# Altium PCB LT3790.PcbDoc
Units mil, origin at the board's own origin, x right, y up, seen from the top; angles counter-clockwise.
Board outline 3149.61 x 3149.61 mil, 2 copper layers (Top Layer, Bottom Layer); 38 components, 27 nets, 121 pads, 51 vias.
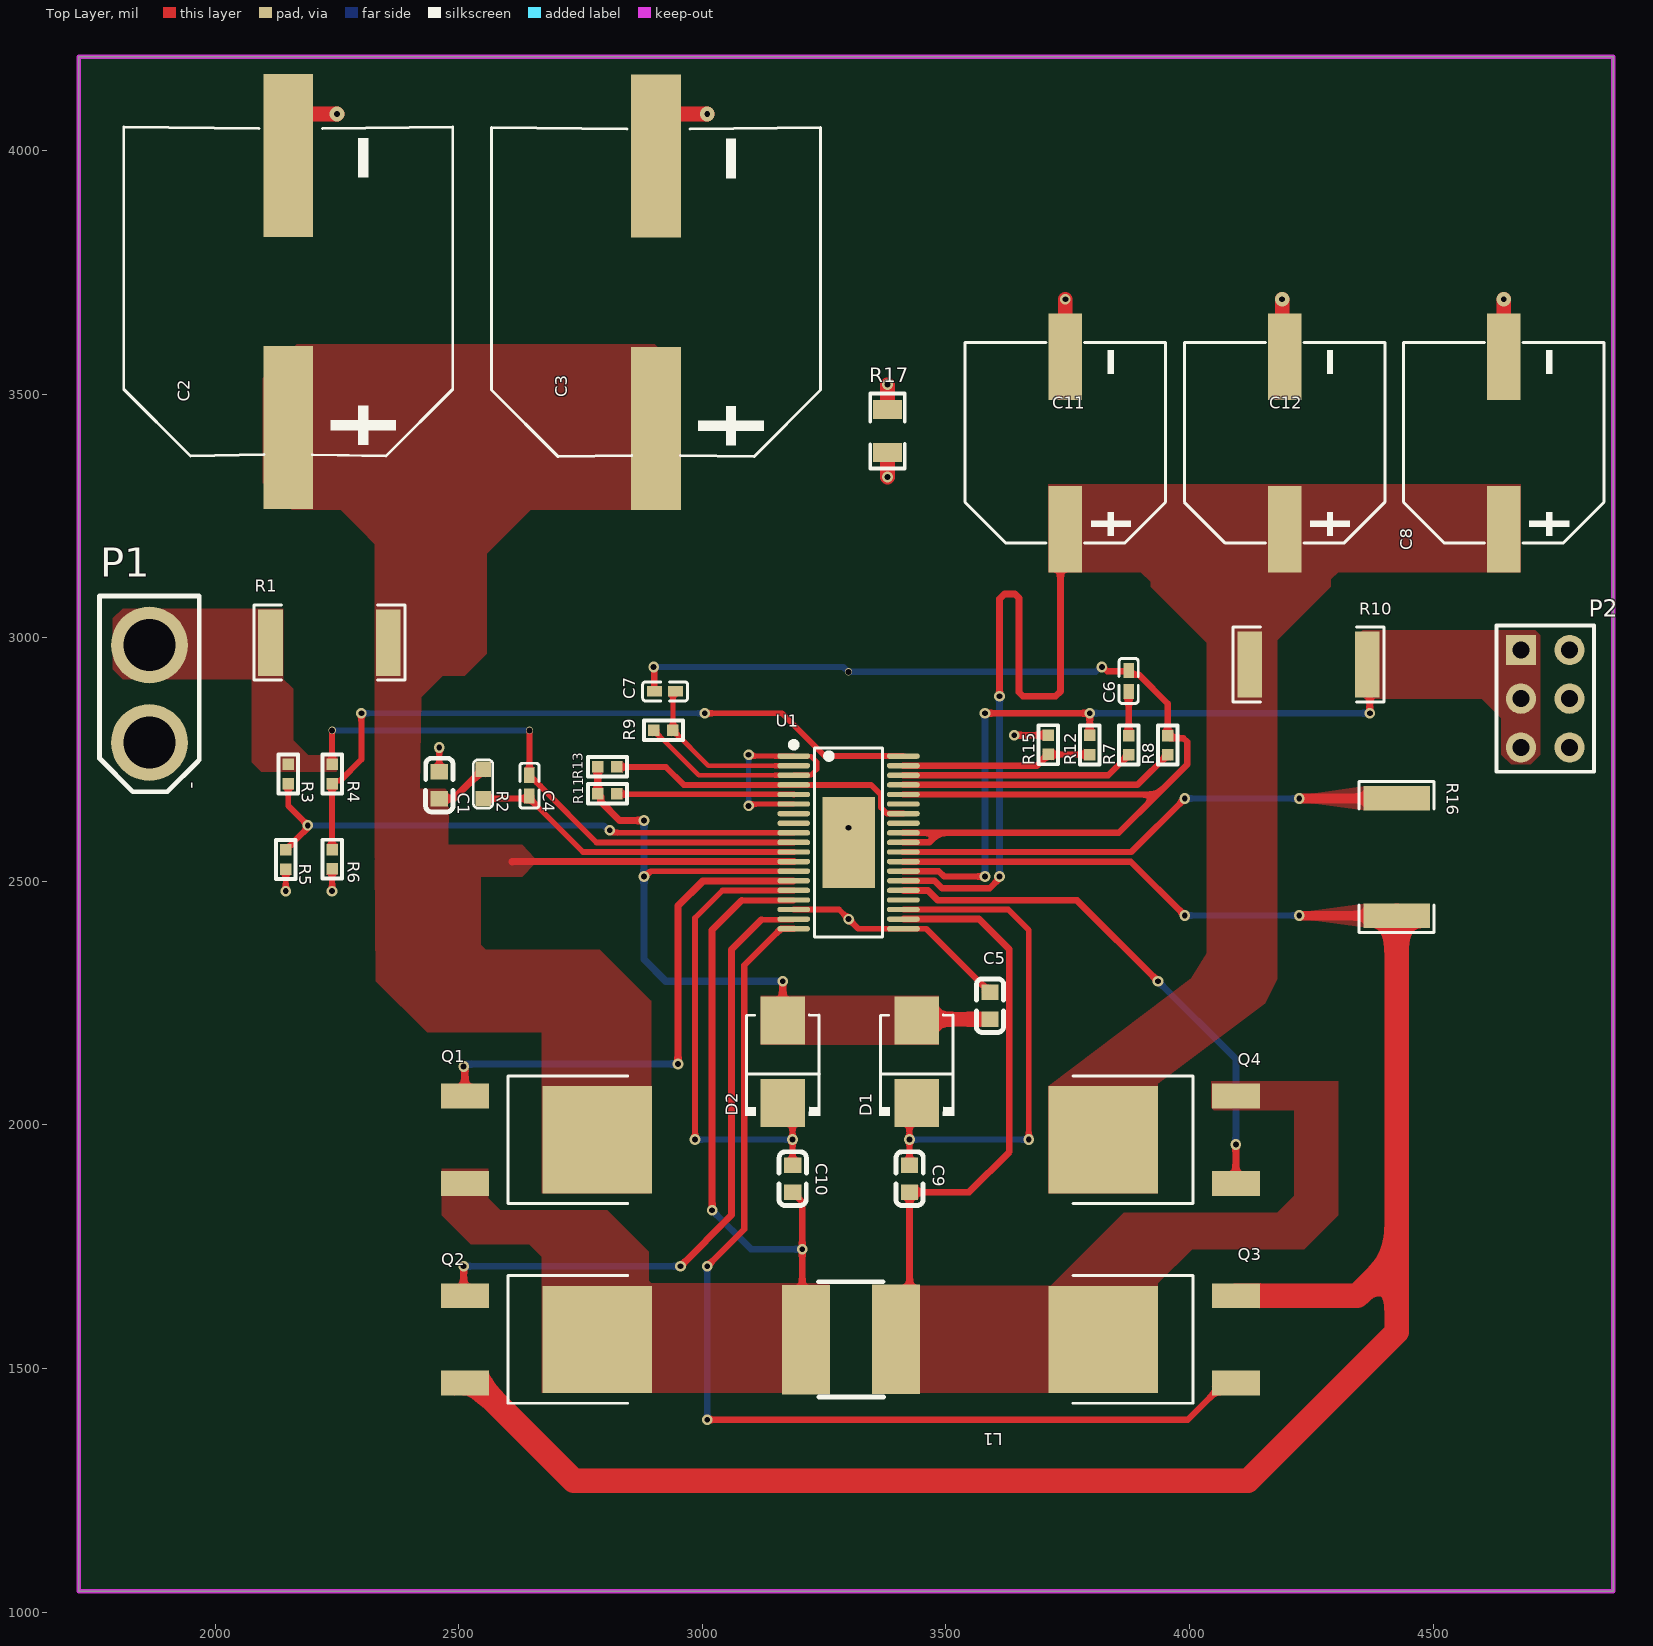
[diagram p0: Top Layer view]
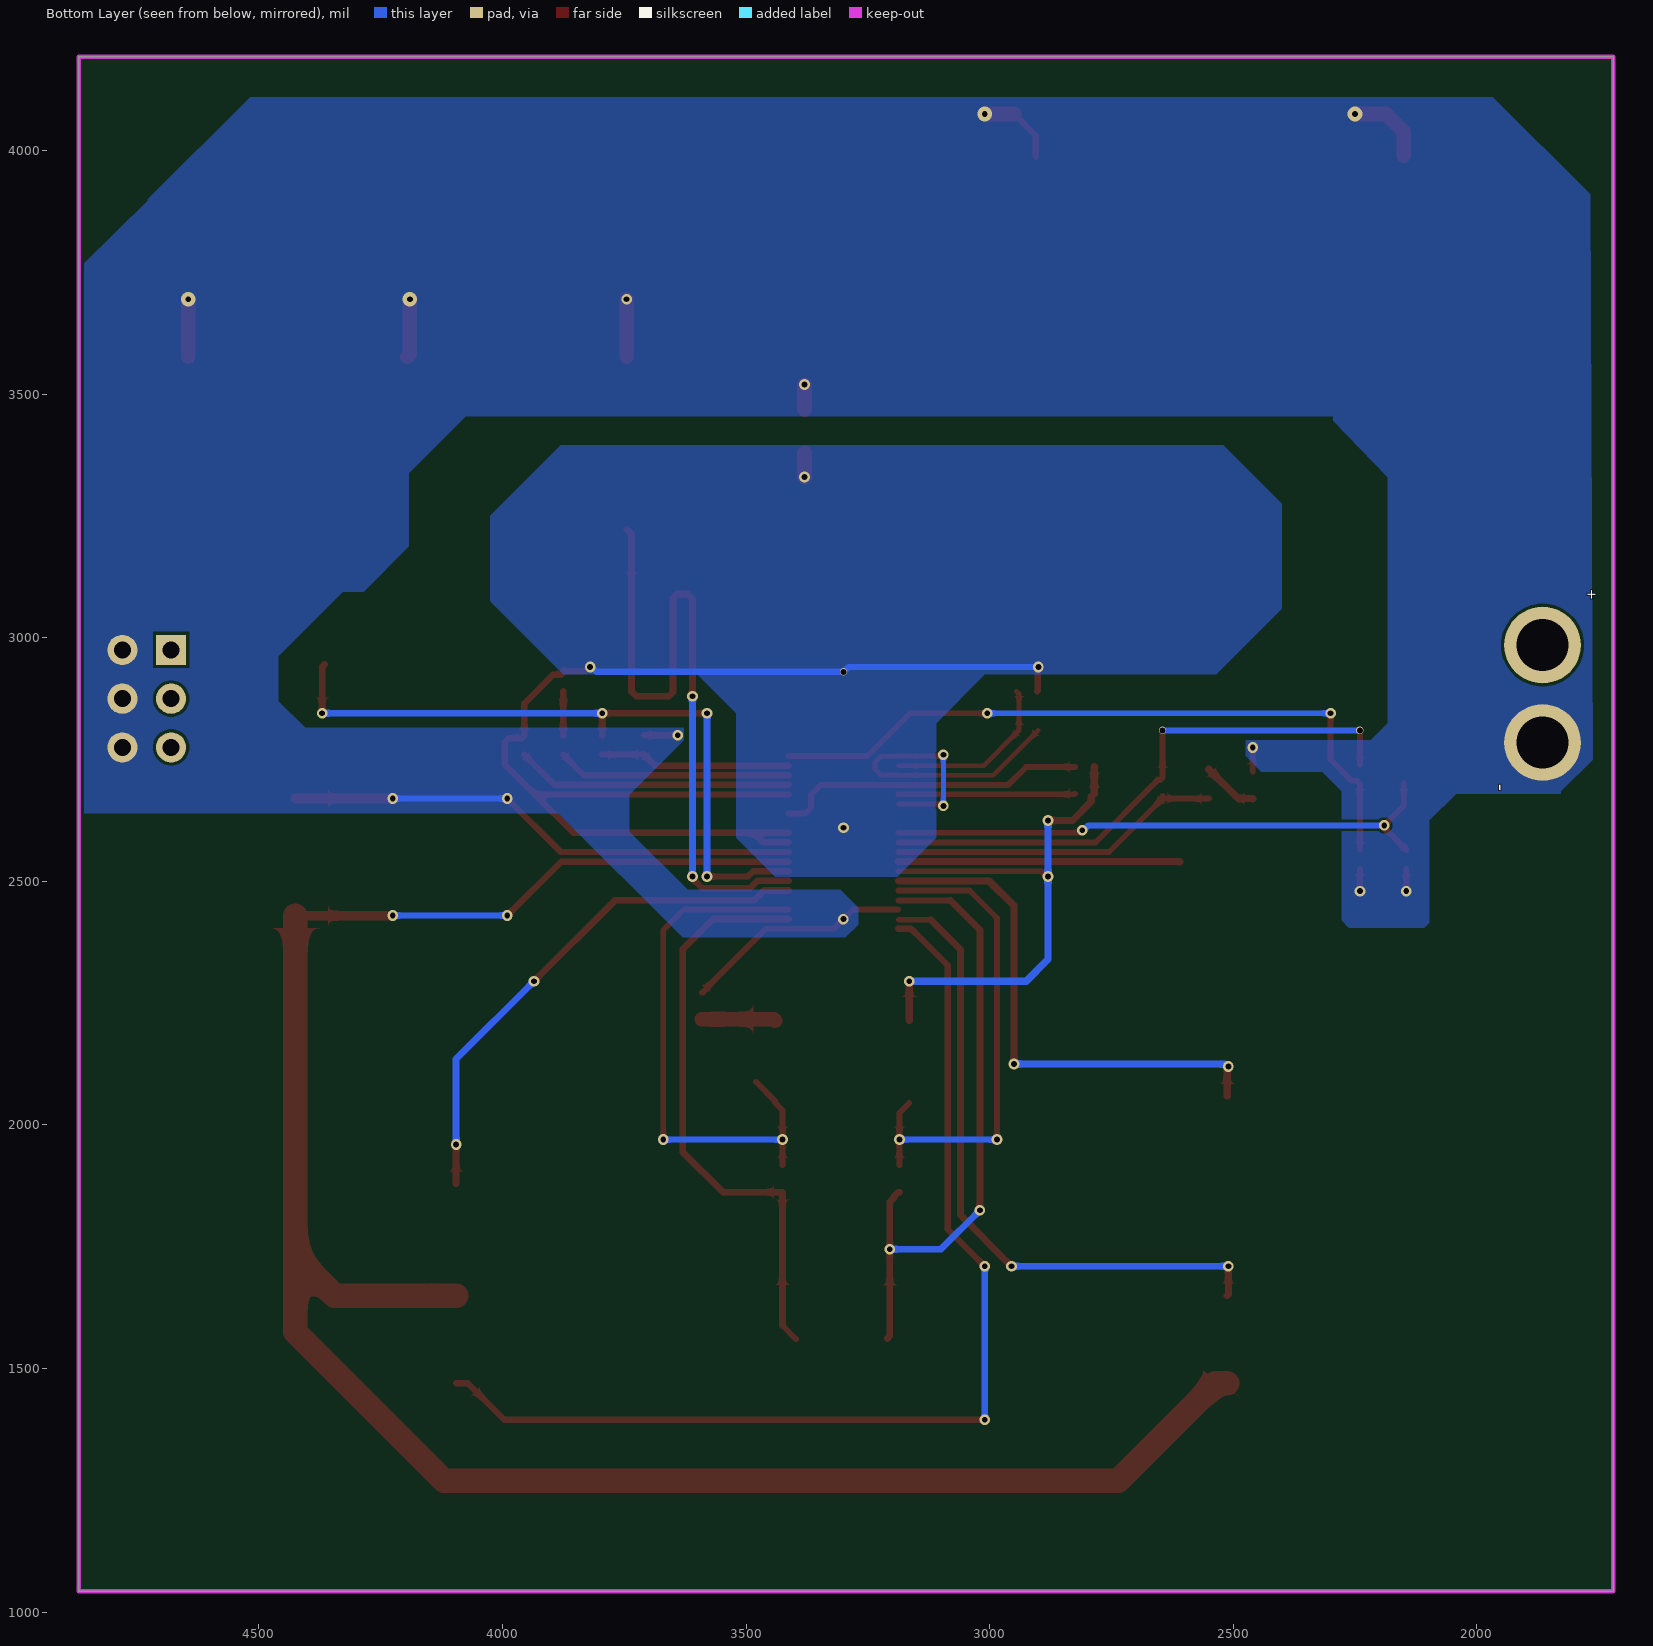
[diagram p1: Bottom Layer view, seen from below]

## Layer stack, top to bottom
Top Solder: solder mask 0.4, Solder Resist, Dk 3.5
Top Layer: signal copper 1.4
Dielectric 1: dielectric 12.6, FR-4, Dk 4.8
Bottom Layer: signal copper 1.4
Bottom Solder: solder mask 0.4, Solder Resist, Dk 3.5

## Board outline
1720,1042.99 1720,4192.6 4869.61,4192.6 4869.61,1042.99

## Design rules (kind name [scope] priority, off if disabled: settings)
Clearance Clearance_1 [All] p1: gap=6 ignorepadtopadclearanceinfootprint=FALSE except(0: Arc-Hole Track-Hole SMDPad-Hole THPad-Hole Via-Hole Fill-Hole Poly-Hole Region-Hole Text-Hole)
Clearance [All] p2: gap=10 ignorepadtopadclearanceinfootprint=FALSE except(0: Arc-Hole Track-Hole SMDPad-Hole THPad-Hole Via-Hole Fill-Hole Poly-Hole Region-Hole Text-Hole)
HoleToHoleClearance [All] p1: gap=0 allowstackedmicrovias=TRUE
MinimumSolderMaskSliver [All] p1: minsoldermaskwidth=0
PlaneClearance 1 [All] p1: clearance=20
PlaneConnect [All] p1: planeconnectstyle=Direct reliefexpansion=20 reliefentries=4 reliefconductorwidth=10 reliefairgap=10
PolygonConnect [All] p1: connectstyle=Direct reliefconductorwidth=10 reliefentries=4 polygonreliefangle="90 Angle" airgapwidth=10
RoutingCorners RoutingCorners_1 [All] p1: cornerstyle=45-Degree minsetback=100 maxsetback=100
RoutingCorners [All] p2: cornerstyle=45-Degree minsetback=100 maxsetback=100
RoutingVias [All] p1: holewidth=16 width=20 viastyle="Through Hole" minholewidth=5 minwidth=15 maxholewidth=30 maxwidth=50
SilkToSilkClearance [All] p1: silktosilkclearance=0
SilkToSolderMaskClearance [IsPad] p1: minsilkscreentomaskgap=0 clearancetoexposedcopper=TRUE
SolderMaskExpansion [All] p1: expansion=4 istentingtop=FALSE
Width [All] p1: maxlimit=200 minlimit=5 preferedwidth=10 minimp=50.000000 maximp=50.000000 favimp=50.000000
23 further rules are at their usual default settings.

## Components (designator, comment, footprint, x,y, rotation, side; value= is the part's Value field where it differs from the comment)
C1 "1uF" CAP0603 2459.71,2697.78 r270 top
C2 "63V" "CAP-SMD_D16xl 16.5mm" 2150.02,3710.74 r90 top value=470uF
C3 "63V" "CAP-SMD_D16xl 16.5mm" 2905.02,3709.26 r90 top value=330uF
C4 "470nF" cap0402 2645,2696.46 r90 top
C5 "4.7uF" CAP0603 3590,2245 r270 top
C6 "33nF" cap0402 3875,2911.46 r270 top
C7 "33nF" cap0402 2923.54,2890 r180 top
C8 "35V" SMD,D10xl10.5mm 4645,3400 r90 top value=470uF
C9 "0.1uF" CAP0603 3425,1890 r270 top
C10 "0.1uF" CAP0603 3185,1890 r270 top
C11 "50V" CAP-SMD,D10xl10.5mm 3745,3400 r90 top value=330uF
C12 "50V" CAP-SMD,D10xl10.5mm 4195,3400 r90 top value=330uF
D1 "Diode 10TQ035" LED-SMB 3440.37,2129.64 r90 top
D2 "Diode 10TQ035" LED-SMB 3165.37,2129.64 r90 top
L1 "Inductor" IND-SMD_L6.0-W6.0 3305,1560 r0 top value=68uH
P1 "Header 2" XT30-M 1865,2885 r270 top
P2 "Header 6" HDR-M-2.54_2X3 4738.89,2881.18 r270 top
Q1 "" "N-mos TO-252"#1 2680,1969.76 r180 top
Q2 "" "N-mos TO-252"#1 2680,1559.76 r180 top
Q3 "" "N-mos TO-252"#1 3927.48,1559.76 r0 top
Q4 "" "N-mos TO-252"#2 3927.48,1969.76 r0 top
R1 "0.003Ω" RES2512#1 2234.28,2990 r180 top
R2 "51Ω" RES0603 2550,2700 r270 top
R3 "499K" res0402 2150,2720.32 r270 top
R4 "499K" res0402 2240,2720.32 r270 top
R5 "56.2K" res0402 2145,2545 r270 top
R6 "27.4K" res0402 2240,2545.63 r270 top
R7 "3.3K" res0402 3875,2779.69 r270 top
R8 "147K" res0402 3955,2779.69 r270 top
R9 "100K" res0402 2920,2810 r0 top
R10 "0.009Ω" RES2512#2 4244.28,2945 r180 top
R11 "200K" res0402 2805,2680 r180 top
R12 "51K" res0402 3795,2780 r90 top
R13 "100K" res0402 2805,2735 r180 top
R15 "2.2K" res0402 3710,2780.32 r270 top
R16 "0.004Ω" RES2512#2 4425,2550 r270 top
R17 "0" RES0805 3380,3424.26 r270 top
U1 "" LT3790 3300,2580 r270 top

## Footprints (in the part's own frame and the unit in brackets; to place one, negate y for a bottom-side part, rotate by r counter-clockwise, add the part's x,y. Pads: shape width x height; smd on the part's side, far side on the other; paste and mask are expansions set on the pad)
cap0402 [mm]
  rect 0.79x0.54 smd: 1(-0.545,0) 2(0.545,0)
  silkscreen extent -1.17,-0.5 1.17,0.5
CAP0603 [mm]
  rect 0.8x0.9 smd: 1(-0.691,0.007) 2(0.708,0.007)
  silkscreen extent -1.4,-0.7 1.4,0.72
CAP-SMD,D10xl10.5mm [mm]
  rect 4.5x1.75 smd: 1(-4.5,0) 2(4.5,0)
  silkscreen extent -5.23,-5.23 5.23,5.23
"CAP-SMD_D16xl 16.5mm" [mm]
  rect 8.5x2.6 smd: 1(-7.093,0.001) 2(7.093,0.001)
  silkscreen extent -8.57,-8.58 8.58,8.58
HDR-M-2.54_2X3 [mil]
  rect 62x62 hole 35: 1(-93.82,-58.89)
  round 62 hole 35: 2(-93.82,41.11) 3(6.18,-58.89) 4(6.18,41.11) 5(106.18,-58.89) 6(106.18,41.11)
  silkscreen extent -144,-109 156,91
IND-SMD_L6.0-W6.0 [mm]
  rect 2.5x5.7 smd: 1(-2.35,-0.013) 2(2.35,0.013)
  silkscreen extent -1.69,-3 1.69,3
LED-SMB [mm]
  rect 2.5x2.3 smd: 1(-2.15,0.009) 2(2.15,0.009)
  silkscreen extent -2.81,-1.95 2.43,1.96
LT3790 [mm]
  oval 0.28x1.715 smd: 1(-4.5,-2.858) 2(-4,-2.858) 3(-3.5,-2.858) 4(-3,-2.858) 5(-2.5,-2.858) 6(-2,-2.858) 7(-1.5,-2.858) 8(-1,-2.858) 9(-0.5,-2.857) 10(0,-2.857) 11(0.5,-2.857) 12(1,-2.857) 13(1.5,-2.857) 14(2,-2.857) 15(2.5,-2.857) 16(3,-2.857) 17(3.5,-2.857) 18(4,-2.857) 19(4.5,-2.857) 20(4.5,2.858) 21(4,2.858) 22(3.5,2.858) 23(3,2.858) 24(2.5,2.858) 25(2,2.858) 26(1.5,2.858) 27(1,2.858) 28(0.5,2.857) 29(0,2.857) 30(-0.5,2.857) 31(-1,2.857) 32(-1.5,2.857) 33(-2,2.857) 34(-2.5,2.857) 35(-3,2.857) 36(-3.5,2.857) 37(-4,2.857) 38(-4.5,2.857)
  rect 4.75x2.74 smd: 39(0,0)
  silkscreen extent -5.24,-3.01 4.93,1.77
"N-mos TO-252"#1 [mm]
  rect 2.5x1.3 smd: 1(4.255,-2.28) 3(4.255,2.28)
  rect 5.7x5.6 smd: 2(-2.655,0)
  silkscreen extent -4.24,-3.33 2.01,3.33
"N-mos TO-252"#2 [mm]
  rect 5.7x5.6 smd: 2(-2.655,0)
  rect 2.5x1.3 smd: 3(4.255,2.28) t(4.255,-2.28)
  silkscreen extent -4.24,-3.33 2.01,3.33
res0402 [mm]
  rect 0.6x0.6 smd: 1(-0.5,0) 2(0.5,0)
  silkscreen extent -1.02,-0.51 1.02,0.51
RES0603 [mil]
  rect 32x32 smd: 1(-30,0) 2(30,0)
  silkscreen extent -50,-20 50,20
RES0805 [mm]
  rect 1x1.5 smd: 1(-1.124,0) 2(1.124,0)
  silkscreen extent -1.96,-0.9 1.96,0.9
RES2512#1 [mil]
  rect 50.49x136.06 smd: 2(-120.72,0) ""(120.72,0)
  silkscreen extent -155,-77 155,77
RES2512#2 [mil]
  rect 50.49x136.06 smd: 1(120.72,0) 2(-120.72,0)
  silkscreen extent -155,-77 155,77
SMD,D10xl10.5mm [mm]
  rect 4.5x1.75 smd: 1(-4.5,0) 2(4.5,0)
  silkscreen extent -5.23,-5.23 5.23,5.23
XT30-M [mm]
  round 4 hole 2.7: 1(-2.54,0) 2(2.54,0)
  silkscreen extent -5.1,-2.6 5.11,2.6, body extent -5.1,-2.8 5.1,2.8, height 10.66

## Part data
C1 C5 C9 C10 C12: library part Cap, "0603", LatestRevisionDate=17-Jul-2002, LatestRevisionNote="Re-released for DXP Platform.", PackageDescription="Radial Cap, Thru-Hole; 2 Leads; 0.3 in Pin Spacing", PackageReference=RAD-0.3, Published=8-Jun-2000, Publisher="Altium Limited"
C2: library part Cap, "SMD D16xl", LatestRevisionDate=17-Jul-2002, LatestRevisionNote="Re-released for DXP Platform.", PackageDescription="Radial Cap, Thru-Hole; 2 Leads; 0.3 in Pin Spacing", PackageReference=RAD-0.3, Published=8-Jun-2000, Publisher="Altium Limited"
C3: library part Cap2, "SMD,D16xl", PackageDescription="Capacitor; 2 Leads", PackageReference=CAPR5-4X5, Published=23-Sep-2002, Publisher="Altium Limited"
C4 C6 C7: library part Cap, "0402", LatestRevisionDate=17-Jul-2002, LatestRevisionNote="Re-released for DXP Platform.", PackageDescription="Radial Cap, Thru-Hole; 2 Leads; 0.3 in Pin Spacing", PackageReference=RAD-0.3, Published=8-Jun-2000, Publisher="Altium Limited"
C8: library part Cap2, "RVT470UF35V67RV0056", PackageDescription="Capacitor; 2 Leads", PackageReference=CAPR5-4X5, Published=23-Sep-2002, Publisher="Altium Limited"
C11: library part Cap, "VHTE1051V331MVTMCG", LatestRevisionDate=17-Jul-2002, LatestRevisionNote="Re-released for DXP Platform.", PackageDescription="Radial Cap, Thru-Hole; 2 Leads; 0.3 in Pin Spacing", PackageReference=RAD-0.3, Published=8-Jun-2000, Publisher="Altium Limited"
D1 D2: "SMBJ5340B", ComponentLink1Description="Manufacturer Link", ComponentLink1URL=http://www.irf.com/, ComponentLink2Description=Datasheet, ComponentLink2URL=http://www.irf.com/product-info/datasheets/data/10tq.pdf, DatasheetVersion=PD-2.057B, LatestRevisionDate=17-Jul-2002, LatestRevisionNote="Re-released for DXP Platform.", Note="Terminal 2 is the TAB and is electrically connected to the cathode", PackageDescription="TO, Thru-Hole, Vertical, Heatsink Mounted; 3 In-Line Leads (1 Absent); Pitch 2.54 mm", PackageReference=TO-220AC, PackageVersion=Feb-1998, Published=8-Jun-2000, Publisher="Altium Limited"
L1: "SWPA6045S680MT", Code_IEC=1005, Code_JEITA=0402, LatestRevisionDate=29-May-2009, LatestRevisionNote="IPC-7351 Footprint Added.", PackageDescription="Chip Inductor", PackageReference=0402-A, Published=8-Jun-2000, Publisher="Altium Limited"
P1: "Header, 2-Pin", LatestRevisionDate=17-Jul-2002, LatestRevisionNote="Re-released for DXP Platform.", Publisher="Altium Limited"
P2: "Header, 6-Pin", LatestRevisionDate=17-Jul-2002, LatestRevisionNote="Re-released for DXP Platform.", Publisher="Altium Limited"
Q1: library part MOSFET-N, "SM4132T9RL", LatestRevisionDate=17-Jul-2002, LatestRevisionNote="Re-released for DXP Platform.", PackageDescription="TO, Flat Index; 3 In-Line, Axial Leads; Body Dia. 4.6mm; Lead Dia. 0.5 mm (max)", PackageReference=E3, PackageVersion=1995/1996, Published=8-Jun-2000, Publisher="Altium Limited"
Q2 Q3 Q4: library part MOSFET-N, "N-Channel MOSFET", LatestRevisionDate=17-Jul-2002, LatestRevisionNote="Re-released for DXP Platform.", PackageDescription="TO, Flat Index; 3 In-Line, Axial Leads; Body Dia. 4.6mm; Lead Dia. 0.5 mm (max)", PackageReference=E3, PackageVersion=1995/1996, Published=8-Jun-2000, Publisher="Altium Limited"
R1 R10 R16: library part Res3, "2512", LatestRevisionDate=29-May-2009, LatestRevisionNote="IPC-7351 Footprint Added.", PackageDescription="Chip Resistor", PackageReference=J1-0603, Published=8-Jun-2000, Publisher="Altium Limited"
R2: library part Res3, "0603", LatestRevisionDate=29-May-2009, LatestRevisionNote="IPC-7351 Footprint Added.", PackageDescription="Chip Resistor", PackageReference=J1-0603, Published=8-Jun-2000, Publisher="Altium Limited"
R3 R4 R5 R6 R12 R15: library part Res3, "0402", LatestRevisionDate=29-May-2009, LatestRevisionNote="IPC-7351 Footprint Added.", PackageDescription="Chip Resistor", PackageReference=J1-0603, Published=8-Jun-2000, Publisher="Altium Limited"
R7 R8 R9 R11 R13: library part Res1, "0402", LatestRevisionDate=17-Jul-2002, LatestRevisionNote="Re-released for DXP Platform.", PackageDescription="Axial Device, Thru-Hole; 2 Leads; 0.3 in Pin Spacing", PackageReference=AXIAL-0.3, Published=8-Jun-2000, Publisher="Altium Limited"
R17: library part Res2, "0805", LatestRevisionDate=17-Jul-2002, LatestRevisionNote="Re-released for DXP Platform.", PackageDescription="Axial Device, Thru-Hole; 2 Leads; 0.4 in Pin Spacing", PackageReference=AXIAL-0.4, Published=8-Jun-2000, Publisher="Altium Limited"
U1: library part LT3790EFE#PBF

## Via types
v1: diameter 22, hole 12, Top Layer to Bottom Layer, 44 vias
v2: diameter 30, hole 12, Top Layer to Bottom Layer, 4 vias
v3: diameter 15, hole 12, Top Layer to Bottom Layer, 3 vias

## Nets (pads, with @x,y where several pads share a name; then routed paths per layer and width w, separated by ;. In a path a pad name is that pad's centre, name@x,y a point inside that pad or via, vN(x,y) a via of type N, cw(c..) or ccw(c..) an arc to the next point about the centre after c; other vN are vias at no path point)
BG1: Q2.1 U1.18 | length 1351.7
  Top Layer w12: 3121.35,2421.35 U1.18@3186.33,2421.35
  Top Layer w14: v1(2510,1710) 2510,1652 Q2.1 ; v1(2955,1710) 3060,1815 3060,2360 3121.35,2421.35
  Bottom Layer w14: v1(2510,1710) v1(2955,1710)
BG2: Q3.1 U1.19 | length 2212.8
  Top Layer w13: v1(3010,1395) 3996.38,1395 4071.38,1470 Q3.1 ; v1(3010,1710) 3085.98,1785.98 3085.98,2327.59 3161.23,2402.84 U1.19
  Bottom Layer w13: v1(3010,1395) v1(3010,1710)
BST1: C10.1 D2.1 U1.15 | length 1017.1
  Top Layer w12: v1(2985,1970) 2985,2425 3041.09,2481.09 3187.01,2481.09 U1.15 ; D2.1 3185,2025 v1(3185,1970) 3185.15,1969.85 3185.15,1917.37 C10.1
  Bottom Layer w12: v1(2985,1970) v1(3185,1970)
BST2: C9.1 D1.1 U1.22 | length 1143.6
  Top Layer w12: U1.22 3627.79,2442.21 3670,2400 v1(3670,1970) ; C9.1 3425.15,1917.37 3425.15,1969.85 v1(3425,1970) 3425,2030 D1.1 3440,2048.94 D1.1@3479.28,2088.21
  Bottom Layer w12: v1(3425,1970) v1(3670,1970)
C/10: R13.1 U1.4 U1.32 | length 642.9
  Top Layer w12: R13.1 2925,2735 2961.89,2698.11 U1.4 3346.3,2698.11 3366.74,2677.67 3366.74,2651.49 3378.68,2639.55 3412.01,2639.55 U1.32
EN/UVLO: R3.2 R5.1 U1.9 | length 1175
  Top Layer w12: R5.1 2188.09,2607.77 2188.09,2613.09 v1(2190,2615) 2150,2655 R3.2 ; v1(2810,2605) 2812.71,2605 2818.02,2599.69 U1.9
  Bottom Layer w12: v1(2190,2615) 2797.29,2615 2807.29,2605 v1(2810,2605)
FB: R12.1 R15.2 U1.37 | length 392.2
  Top Layer w13: U1.37 3686.86,2737.49 R15.2 3710.16,2760.47 3794.84,2760.47 R12.1
INTVCC: C5.2 D1.2 D2.2 R11.2 R13.2 U1.13 | length 1311.8
  Top Layer w12: R13.2@2785,2734.69 R13.2 ; R11.2 R11.2@2791.12,2674.19 ; v1(2880,2510) 2882.71,2510 2893.66,2520.95 U1.13
  Top Layer w15: R11.2 R13.2 ; R11.2@2791.12,2674.19 2791.12,2663.88 2830,2625 v1(2880,2625) ; D2.2 v1(3165,2295)
  Top Layer w30: D1.2 3442.82,2217.11 C5.2
  Bottom Layer w15: v1(2880,2625) v1(2880,2510) 2880,2340 2925,2295 v1(3165,2295)
ISN: P2.1 P2.3 P2.5 R10.2 R12.2 U1.26 | length 1444.4
  Top Layer w13: U1.26 3485.18,2520.95 3496.13,2510 v1(3580,2510)
  Top Layer w14: v1(3580,2845) v1(3795,2845) R12.2 ; R10.2 4370,2940 v1(4370,2845)
  Bottom Layer w14: v1(3580,2510) v1(3580,2845) ; v1(3795,2845) v1(4370,2845)
ISP: C8.1 C11.1 C12.1 Q4.2 R10.1 U1.25 | length 1456.7
  Top Layer w13: U1.25 3476.58,2501.26 3491.84,2486 3589.94,2486 v1@3608.47,2504.53
  Top Layer w14: v1@3608.47,2504.53 3608.47,2508.47 v1(3610,2510) ; v1(3610,2880) 3610,3080 3620,3090 3641.8,3090 3650,3081.8 3650,2888.2 3658.2,2880 3725,2880 3735,2890 3735,3212.84 C11.1
  Bottom Layer w14: v1(3610,2510) v1(3610,2880)
IVINN: C4.1 R2.2 U1.11 | length 689.8
  Top Layer w12: R2.2 2640.37,2670 C4.1@2645,2674.63 ; C4.1 C4.1@2645,2674.63 ; U1.11 2754.76,2560.32 2645,2670.08 C4.1@2645,2674.63
IVINP: C4.2 P1.1 R1. R3.1 R4.1 U1.10 | length 1169.7
  Top Layer w12: R4.1 v3(2240,2810) ; v3(2645,2810) 2645,2712.99 2649.63,2708.36 2654.55,2708.36 2660.36,2702.55 2660.6,2702.55 2667.63,2695.52 2667.63,2695.29 2782.91,2580.01 U1.10
  Bottom Layer w12: v3(2240,2810) v3(2645,2810)
NetC6_2: C6.2 R7.1 | length 90.6
  Top Layer w14: R7.1 C6.2
NetC7_1: C7.1 R9.2 U1.2 | length 360
  Top Layer w10: C7.1 2939.69,2884.69 R9.2 3012.2,2737.49 U1.2
NetR7_2: R7.2 U1.36 | length 480
  Top Layer w13: U1.36 3832.8,2717.8 R7.2
NetR8_2: R8.2 U1.35 | length 568.1
  Top Layer w13: U1.35 3893.11,2698.11 R8.2
NetR9_1: R9.1 U1.1 U1.3 U1.6 | length 738.2
  Top Layer w10: R9.1 2992.52,2717.8 U1.3 3187.7,2718 3223,2718 3235,2730 3235,2745 3223.03,2756.97 3187.7,2756.97 U1.1 3101.08,2757.17 3098.25,2760 v1(3095,2760) ; v1(3095,2655) 3098.25,2655 3101.99,2658.74 U1.6
  Bottom Layer w10: v1(3095,2655) v1(3095,2760)
Node1: C1.2 C2.1 C3.1 Q1.2 R1.2 R2.1 U1.12 | length 692.7
  Top Layer w15: C1.2 2460.11,2670 2490,2670 R2.1 ; 2610,2540 2610.64,2540.64 U1.12
OVLO: R4.2 R6.1 U1.38 | length 1459.7
  Top Layer w12: R6.1 R4.2 2245.81,2706.44 2256.44,2706.44 2300,2750 v1(2300,2845) ; v1(3005,2845) 3163.45,2845 3251.28,2757.17 U1.38
  Bottom Layer w12: v1(2300,2845) v1(3005,2845)
PGND: C1.1 C2.2 C3.2 C5.1 C8.2 C11.2 C12.2 P1.2 P2.2 P2.4 P2.6 R5.2 R6.2 R15.1 R16.2 R17.1 U1.17 U1.20 U1.28 | length 2479.8
  Top Layer w12: v1(2145,2480) R5.2 ; v1(2240,2480) R6.2 ; C1.1 v1(2460,2775) ; U1.17 3280.56,2442.21 3319.93,2402.84 U1.20 3459.67,2402.84 3578.58,2283.94 3578.58,2281.97 3588.33,2272.22 C5.1
  Top Layer w13: C3.2 2905,4030.32 C3.2@2949.68,4075 ; U1.28 3880.32,2560.32 v1(3990,2670)
  Top Layer w14: v1(3640,2800) R15.1
  Top Layer w20: v1(4225,2670) 4225.36,2670.36 4424.64,2670.36 R16.2
  Top Layer w30: C2.2 2150,4038.82 2186.18,4075 v2(2250,4075) ; C3.2@2949.68,4075 v2(3010,4075) ; v1(3379.8,3519.73) 3380,3519.53 R17.1 ; C11.2 v1(3745,3695) ; v2(4190,3695) 4190,3582.16 C12.2 ; C8.2 v2(4645,3695)
  Bottom Layer w13: v1(3990,2670) v1(4225,2670)
  other v1: 3300.24,2422.53
SGND: C6.1 C7.2 R8.1 R17.2 U1.29 U1.30 U1.34 U1.39 | length 2626.2
  Top Layer w13: v1(2900,2940) 2901.04,2938.96 2901.04,2891.04 C7.2 ; U1.29 3466.15,2580.01 3485.84,2599.69 3512.23,2599.69 ; U1.30 3512.23,2599.69 ; U1.34 3933.43,2678.43 ; v1(3820,2940) 3822.44,2940 3830.98,2931.46 3870.87,2931.46 3872.33,2932.92 C6.1 3875,2927.99 3879.13,2923.86 3896.14,2923.86 3955,2865 R8.1 3960.31,2794.06 3987.38,2794.06 3995,2786.44 3995,2740 3933.43,2678.43 ; 3512.23,2599.69 3854.69,2599.69 3933.43,2678.43
  Top Layer w30: v1(3380,3330) R17.2
  Bottom Layer w13: v1(2900,2940) 3289.46,2940 3299.46,2930 3807.56,2930 3817.56,2940 v1(3820,2940)
  other v1: 3300,2610
  other v3: 3300,2930
SHORT: R11.1 U1.5 | length 363.5
  Top Layer w12: R11.1 2825.76,2678.92 3187.01,2678.92 U1.5
SNSP: Q2.3 Q3.3 R16.1 U1.27 | length 4397.9
  Top Layer w13: U1.27 3879.36,2540.64 v1(3990,2430)
  Top Layer w20: v1(4225,2430) 4225.36,2429.64 4424.64,2429.64 R16.1
  Top Layer w50: Q2.3 2536.1,1470 2736.1,1270 4120,1270 4425,1575 4425,1730 ; Q3.3 4344.53,1649.53 4425,1730 ; R16.1 4425,1730
  Bottom Layer w13: v1(3990,2430) v1(4225,2430)
SW1: C10.2 L1.1 Q1.3 Q2.2 U1.16 | length 1296.1
  Top Layer w13: 3080.72,2460.72 U1.16@3186.33,2460.72
  Top Layer w14: v1(3020,1825) 3020,2400 3080.72,2460.72 ; C10.2 3187.26,1862.11 3196.01,1853.36 3196.01,1851.39 3205,1842.4 v1(3205,1745) 3205,1566.98 L1.1@3210,1561.98
  Bottom Layer w14: v1(3020,1825) 3100,1745 v1(3205,1745)
SW2: C9.2 L1.2 Q3.2 Q4.3 U1.21 | length 1210.6
  Top Layer w12: L1.2 L1.2@3425.29,1588.27
  Top Layer w14: U1.21 3567.47,2422.53 3630,2360 3630,1945 3547.11,1862.11 C9.2 L1.2@3425.29,1588.27
TG1: Q1.1 U1.14 | length 1086.4
  Top Layer w14: 3000.59,2500.59 U1.14@3186.83,2500.59
  Top Layer w15: v1(2510,2120) 2510,2118.11 2512.48,2115.63 Q1.1 ; v1(2950,2125) 2950,2450 3000.59,2500.59
  Bottom Layer w15: v1(2510,2120) 2511.89,2120 2516.89,2125 v1(2950,2125)
TG2: Q4.t U1.24 | length 1081.1
  Top Layer w14: U1.24 3463.42,2481.58 3483.79,2461.21 3768.79,2461.21 v1(3935,2295) ; Q4.t v1(4095,1960)
  Bottom Layer w14: v1(3935,2295) 4095,2135 v1(4095,1960)
pads on no net: U1.7 U1.8 U1.23 U1.31 U1.33

## Polygon pours and split planes (outlines as drawn)
ISN on Top Layer "ISN_L01_P015" (solid, remove dead copper, pour order 15): 4700,2740 4720,2760 4720,3005 4710,3015 4355,3015 4340,3000 4340,2895 4360,2875 4600,2875 4640,2835 4640,2760 4660,2740
SNSP on Top Layer "SNSP_L01_P013" (solid, remove dead copper, pour order 13): 4250,2440 4250,2420 4360,2405 4360,2455
PGND on Top Layer "PGND_L01_P012" (solid, remove dead copper, pour order 12): 4250,2680 4250,2660 4360,2645 4360,2695.95
SW2 on Top Layer "SW2_L01_P011" (solid, remove dead copper, pour order 11): 4005,1745 4235,1745 4305,1815 4305,2090 4045,2090 4045,2035 4050,2030 4215,2030 4215,1855 4180,1820 3865,1820 3715,1670 3710,1670 3710,1630 3935,1630 3935,1675
ISP on Top Layer "ISP_L01_P010" (solid, remove dead copper, pour order 10): 4305,3135 4290,3120 4290,3105 4175,2990 4035,2990 3920,3105 3920,3115 3900,3135 3710,3135 3710,3315 4680,3315 4680,3135
ISP on Top Layer "ISP_L01_P009" (solid, remove dead copper, pour order 9): 4150,3025 4180,2995 4180,2300 4155,2250 3935,2085 3935,1860 3710,1860 3710,2080 4003.61,2301.5 4035,2352.5 4035,2990 4070,3025
SW2 on Top Layer "SW2_L01_P008" (solid, remove dead copper, pour order 8): 3350,1670 3935,1670 3935,1450 3350,1450
SW1 on Top Layer "SW1_L01_P007" (solid, remove dead copper, pour order 7): 2560,1850 2585,1825 2805,1825 2890,1740 2890,1680 2895,1675 3260,1675 3260,1455 3265,1450 2670,1450 2670,1730 2645,1755 2525,1755 2465,1815 2465,1910 2560,1910
INTVCC on Top Layer "INTVCC_L01_P006" (solid, remove dead copper, pour order 6): 3120,2265 3485,2265 3485,2165 3120,2165
Node1 on Top Layer "NODE1_L01_P005" (solid, remove dead copper, pour order 5): 2475,2575 2630,2575 2655,2548.04 2655,2535 2630,2510 2475,2510
Node1 on Top Layer "NODE1_L01_P004" (solid, remove dead copper, pour order 4): 2330,2295 2435,2190 2670,2190 2670,1860 2900,1860 2895,1865 2895,2255 2894.35,2255 2789.35,2360 2555,2360 2545,2370 2545,2545 2327.5,2547.5
Node1 on Top Layer "NODE1_L01_P002" (solid, remove dead copper, pour order 2): 2602.5,3217.5 2557.5,3172.5 2557.5,2967.5 2512.5,2922.5 2467.5,2922.5 2422.5,2877.5 2420,2690 2480,2690 2477.5,2522.5 2352.5,2522.5 2327.5,2547.5 2327.5,3192.5 2297.5,3222.5 2257.5,3262.5 2157.5,3262.5 2102.5,3317.5 2097.5,3317.5 2097.5,3532.5 2167.5,3602.5 2902.5,3602.5 2952.5,3552.5 2952.5,3312.5 2902.5,3262.5 2647.5,3262.5
IVINP on Top Layer "IVINP_L01_P003" (solid, remove dead copper, pour order 3): 2248.6,2758.76 2248.9,2758.76 2251.76,2755.93 2251.53,2728.89 2248.13,2725.49 2094.51,2725.49 2075,2745 2075,2920 2135,2920 2160,2895 2160,2790 2190,2760
IVINP on Top Layer "IVINP_L01_P001" (solid, remove dead copper, pour order 1): 1810,3060 1790,3040 1790,2935 1810,2915 2140,2915 2140,3060
SGND on Bottom Layer "SGND_L02_P018" (solid, remove dead copper, pour order 18): 3600,2925 3520,2845 3515,2845 3515,2880 3470,2925 3225,2925 3125,2825 3110,2825 3010,2925 2535,2925 2400,3060 2400,3275 2520,3395 3880,3395 4025,3250 4025,3075 3875,2925
PGND on Bottom Layer "PGND_L02_P016" (solid, remove dead copper, pour order 16): 2295,3455 2295,3445 2182.5,3330 2182.5,2825 2217.5,2790 2474.58,2790 2474.58,2757.5 2442.08,2725 2317.5,2725 2277.5,2685 2277.5,2420 2262.5,2405 2107.5,2405 2097.5,2415 2097.5,2625 2042.5,2680 1827.5,2680 1827.5,2685 1762.5,2750 1766.76,3910 1967.5,4110 4517.5,4110 4727.5,3900 4727.5,3897.5 4867.11,3760 4867.11,2645 4862.11,2640 3885,2640 3630,2385 3295.89,2385 3270,2410.58 3270,2446.35 3306.15,2482.5 3620,2482.5 3739.89,2602.39 3739.96,2677.54 3627.5,2790 3627.5,2815 4405,2815 4460,2870 4460,2962.5 4327.5,3095 4285,3095 4192.5,3187.5 4192.5,3340 4190,3340 4075,3455
SGND on Bottom Layer "SGND_L02_P017" (solid, remove dead copper, pour order 17): 3415,3065 3520,2960 3520,2590 3440,2510 3190,2510 3110,2590 3110,2970 3205,3065

## Keep-outs
Keep-Out Layer:
  the board outline again, w10

## Text inside footprints (layer, text, board x,y; h text height)
P1: Top Overlay "-" at 1942,2705 h30 r270; Bottom Overlay "-" at 1942,2685 h30 r270; Bottom Overlay "+" at 1755.76,3077.11 h20 r270